# Altium PCB PCB.PcbDoc (part 2 of 3)
Units mm, origin at the board's own origin, x right, y up, seen from the top; angles counter-clockwise.
Board outline 68.53 x 53.3 mm, 2 copper layers (Top Layer, Bottom Layer); 60 components, 48 nets, 220 pads, 55 vias.
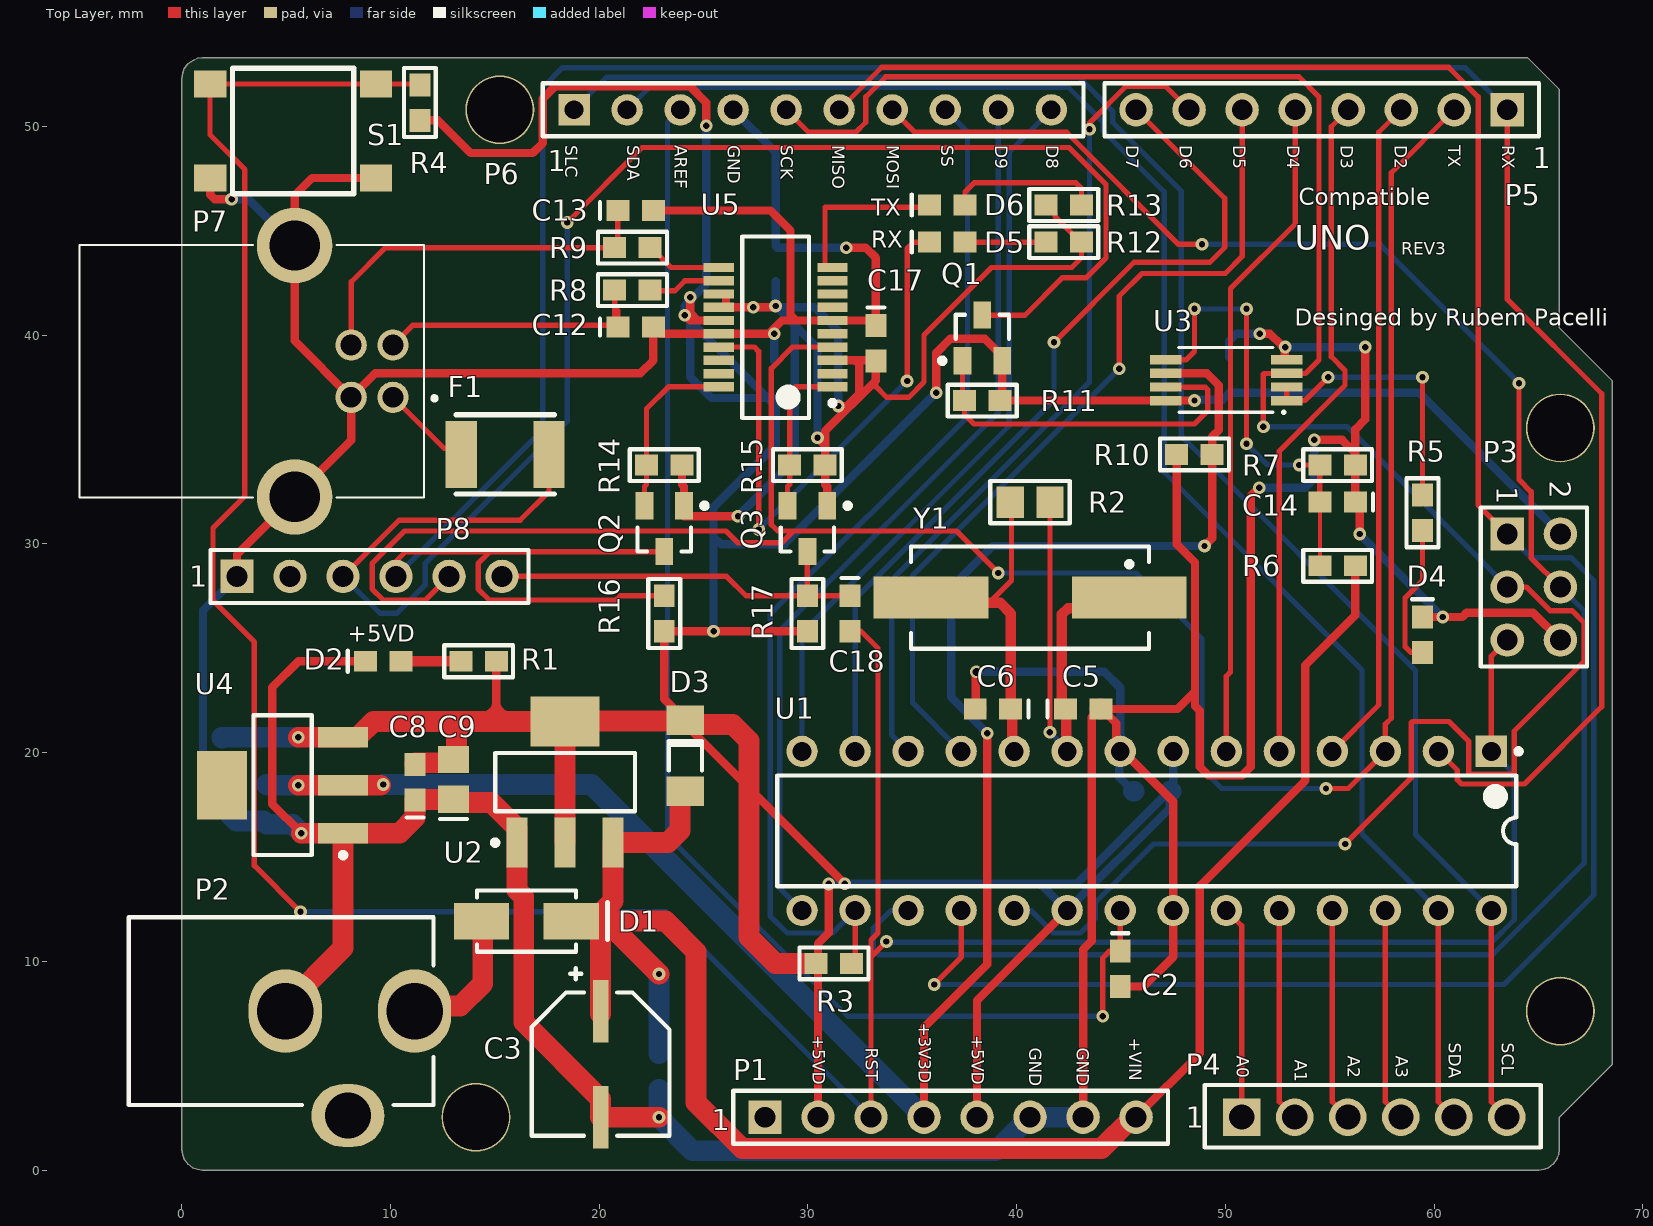
[diagram p0: Top Layer view]

## Part data (continued)
U3: library part LM358PWR, Case/Package=TSSOP, Input Bias Current=250nA, Input Offset Voltage (Vos)=7mV, Manufacturer="Texas Instruments", Max Dual Supply Voltage=16V, Max Operating Temperature=70°C, Max Supply Voltage=32V, Min Dual Supply Voltage=1.5V, Min Operating Temperature=0°C, Min Supply Voltage=3V, Nominal Supply Current=1.2mA, Operating Supply Current=1mA, Output Current=30mA, Package Quantity=1, Quiescent Current=600mA, Supplier Part Number 1=595-LM358PWR, Voltage Gain=100dB, Bandwidth=700kHz, Common Mode Rejection Ratio=65dB, ComponentLink1Description=http://www.ti.com/lit/ds/symlink/lm358.pdf, ComponentLink1URL=http://www.ti.com/lit/ds/symlink/lm358.pdf, ComponentLink2Description=http://www.produktinfo.conrad.com/datenblaetter/1000000-1099999/001072378-da-01-en-IC_OPAMP_GP_700KHZ_LM358PWR_TSSOP_8_TID.pdf, ComponentLink2URL=http://www.produktinfo.conrad.com/datenblaetter/1000000-1099999/001072378-da-01-en-IC_OPAMP_GP_700KHZ_LM358PWR_TSSOP_8_TID.pdf, Gain Bandwidth Product=700kHz, Lead Free="Lead Free", Manufacturer Part Number=LM358PWR, Mount="Surface Mount", Number of Amplifiers=2, Number of Channels=2, Number of Circuits=2, Number of Elements=2, Number of Pins=8, Operating Supply Voltage=16V, Output Current per Channel=30mA, Packaging="Tape and Reel", Pricing 1="1=0.38, 10=0.284, 50=0.284, 100=0.154, 1000=0.116, 10000=0.093 (USD)", Radiation Hardening=No, REACH SVHC="No SVHC", Slew Rate=0.3V/µs, Stock 1=5361, Supplier 1=Mouser, Unity Gain Bandwidth Product=700kHz
U4: library part Regulator, "3V3 supplier", Case/Package=SOT-223, Dropout Voltage=1.07V, Input Bias Current=6mA, Manufacturer="ON Semiconductor", Manufacturer Part Number=NCP1117ST33T3G, Max Input Voltage=20V, Max Operating Temperature=125°C, Max Output Current=1A, Max Output Voltage=3.3V, Max Supply Voltage=15V, Min Input Voltage=3.5V, Min Operating Temperature=0°C, Min Supply Voltage=4.75V, Output Voltage Accuracy=1%, Package Quantity=1, Quiescent Current=10mA, Reference Voltage=1.25V, Supplier Part Number 1=NCP1117ST33T3GOSDKR-ND, Accuracy=1%, Contact Plating=Matte,Tin, Halogen Free="Halogen Free", Height=1.69mm, Lead Free="Lead Free", Length=6.7mm, Min Current Limit=1A, Min Output Voltage=3.3V, Mount="Surface Mount", Nominal Output Voltage=3.3V, Number of Outputs=1, Number of Pins=3, Number of Regulators=1, Output Current=1A, Output Type=Fixed, Output Voltage=3.3V, Packaging="Tape and Reel", Polarity=Positive, Pricing 1="1=0.52, 10=0.444, 100=0.3315, 500=0.26048, 1000=0.20129 (USD)", Radiation Hardening=No, REACH SVHC="No SVHC", Stock 1=58869, Supplier 1=Digi-Key, Termination=SMD/SMT, Width=3.7mm
U5: "USB to Full-Handshake UART Interface Chip, UHCI/OHCI/EHCI Compatible, USB 2.0 Compatible, -40 to +85 degC, 20-Pin SSOP, Pb-Free, Tape and Reel", Case/Package=SSOP, Manufacturer=FTDI, Max Operating Temperature=85°C, Max Supply Voltage=5.5V, Min Operating Temperature=-40°C, Min Supply Voltage=2.97V, Operating Supply Current=8mA, Operating Supply Voltage=5V, Package Quantity=2000, Supplier Part Number 1=768-1129-6-ND, Code_JEDEC=MO-137-AD, ComponentLink1Description="Manufacturer URL", ComponentLink1URL=http://www.ftdichip.com/, ComponentLink2Description=Datasheet, ComponentLink2URL=http://www.ftdichip.com/Support/Documents/DataSheets/ICs/DS_FT231X.pdf, ComponentLink3Description="FT231X Product Page", ComponentLink3URL=www.ftdichip.com/Products/ICs/FT231X.html, ComponentLink4Description=http://uk.rs-online.com/webdocs/1102/0900766b811020d3.pdf, ComponentLink4URL=http://uk.rs-online.com/webdocs/1102/0900766b811020d3.pdf, ComponentLink5Description=https://media.digikey.com/pdf/Data%20Sheets/FTDI%20Chip%20PDFs/X-Chip_Series_Errata.pdf, ComponentLink5URL=https://media.digikey.com/pdf/Data%20Sheets/FTDI%20Chip%20PDFs/X-Chip_Series_Errata.pdf, ComponentLink6Description=http://www.alliedelec.com/images/products/datasheets/bm/FTDI/70403932.pdf, ComponentLink6URL=http://www.alliedelec.com/images/products/datasheets/bm/FTDI/70403932.pdf, Data Rate=12Mbps, DatasheetVersion="ver 1.2, Feb-2013", Height=0.059inch, Interface=UART,USB, Length=8.74mm, Manufacturer Part Number=FT231XS-R, Mount="Surface Mount", Number of Channels=1, Number of Pins=20, PackageDescription="20-Pin Small Outline Package, 8.6 x 3.9 mm Body, 0.635 mm Pitch", PackageReference=SSOP-20, PackageVersion=Feb-13, Packaging="Tape and Reel", PartNumber=FT231XS-R, Pricing 1="1=2.12, 25=2.05, 100=1.98, 250=1.78, 500=1.60002 (USD)", Radiation Hardening=No, Stock 1=8392, Supplier 1=Digi-Key, Weight=0.016oz, Width=0.157inch
Y1: library part XTAL, "Crystal Oscillator", Case/Package=HC-49/US, ESR (Equivalent Series Resistance)=50R, Frequency Stability=50ppm, Frequency Tolerance=30ppm, Load Capacitance=20pF, Manufacturer Part Number=ECS-160-20-3X-TR, Max Operating Temperature=70°C, Min Operating Temperature=-10°C, Package Quantity=1, Supplier Part Number 1=XC1776DKR-ND, Frequency=16MHz, Height=0.091inch, Lead Free="Lead Free", Length=0.276inch, Mount="Surface Mount", Packaging="Tape and Reel", Pricing 1="1=0.38, 10=0.316, 50=0.2846, 100=0.253, 500=0.24036, 1000=0.2024 (USD)", Stock 1=30831, Supplier 1=Digi-Key, Termination=SMD/SMT, Tolerance=30ppm, Width=0.161inch

## Free pads (board coordinates)
  round 3.3 hole 3.15: 1(66.04,7.62) 2(14.095,2.539) 3(15.24,50.8) 5(66.04,35.56)

## Via types
v1: diameter 0.61, hole 0.305, Top Layer to Bottom Layer, 54 vias
v2: diameter 0.61, hole 0.381, Top Layer to Bottom Layer, 1 vias

## Nets (pads, with @x,y where several pads share a name; then routed paths per layer and width w, separated by ;. In a path a pad name is that pad's centre, name@x,y a point inside that pad or via, vN(x,y) a via of type N, cw(c..) or ccw(c..) an arc to the next point about the centre after c; other vN are vias at no path point)
+3V3D: C11.2 P1.4 R10.1 U3.6 U4.2 | length 89
  Top Layer w0.4: P1.4@35.56,2.54 35.56,6.832 38.584,9.856 v1(38.584,20.94) ; U3.6@47.138,38.171 49.115,38.171 49.683,37.603 49.683,35.458 49.364,35.139 R10.1@49.364,34.29 49.364,30.273 v1(48.998,29.906)
  Top Layer w1: v1(5.588,18.445) U4.2@7.731,18.445 v1@9.514,18.445
  Bottom Layer w0.4: v1(38.584,20.94) 36.856,22.667 36.856,27.925 38.838,29.906 v1(48.998,29.906)
  Bottom Layer w1: C11.2@4.064,18.476 4.095,18.445 v1(5.588,18.445) ; v1(9.652,18.476) 19.624,18.476 P1.4@35.56,2.54